# Altium PCB 2.PcbDoc (part 2 of 3)
Units mil, origin at the board's own origin, x right, y up, seen from the top; angles counter-clockwise.
Board outline 9055.12 x 5905.51 mil, 2 copper layers (Top Layer, Bottom Layer); 240 components, 221 nets, 945 pads, 441 vias.
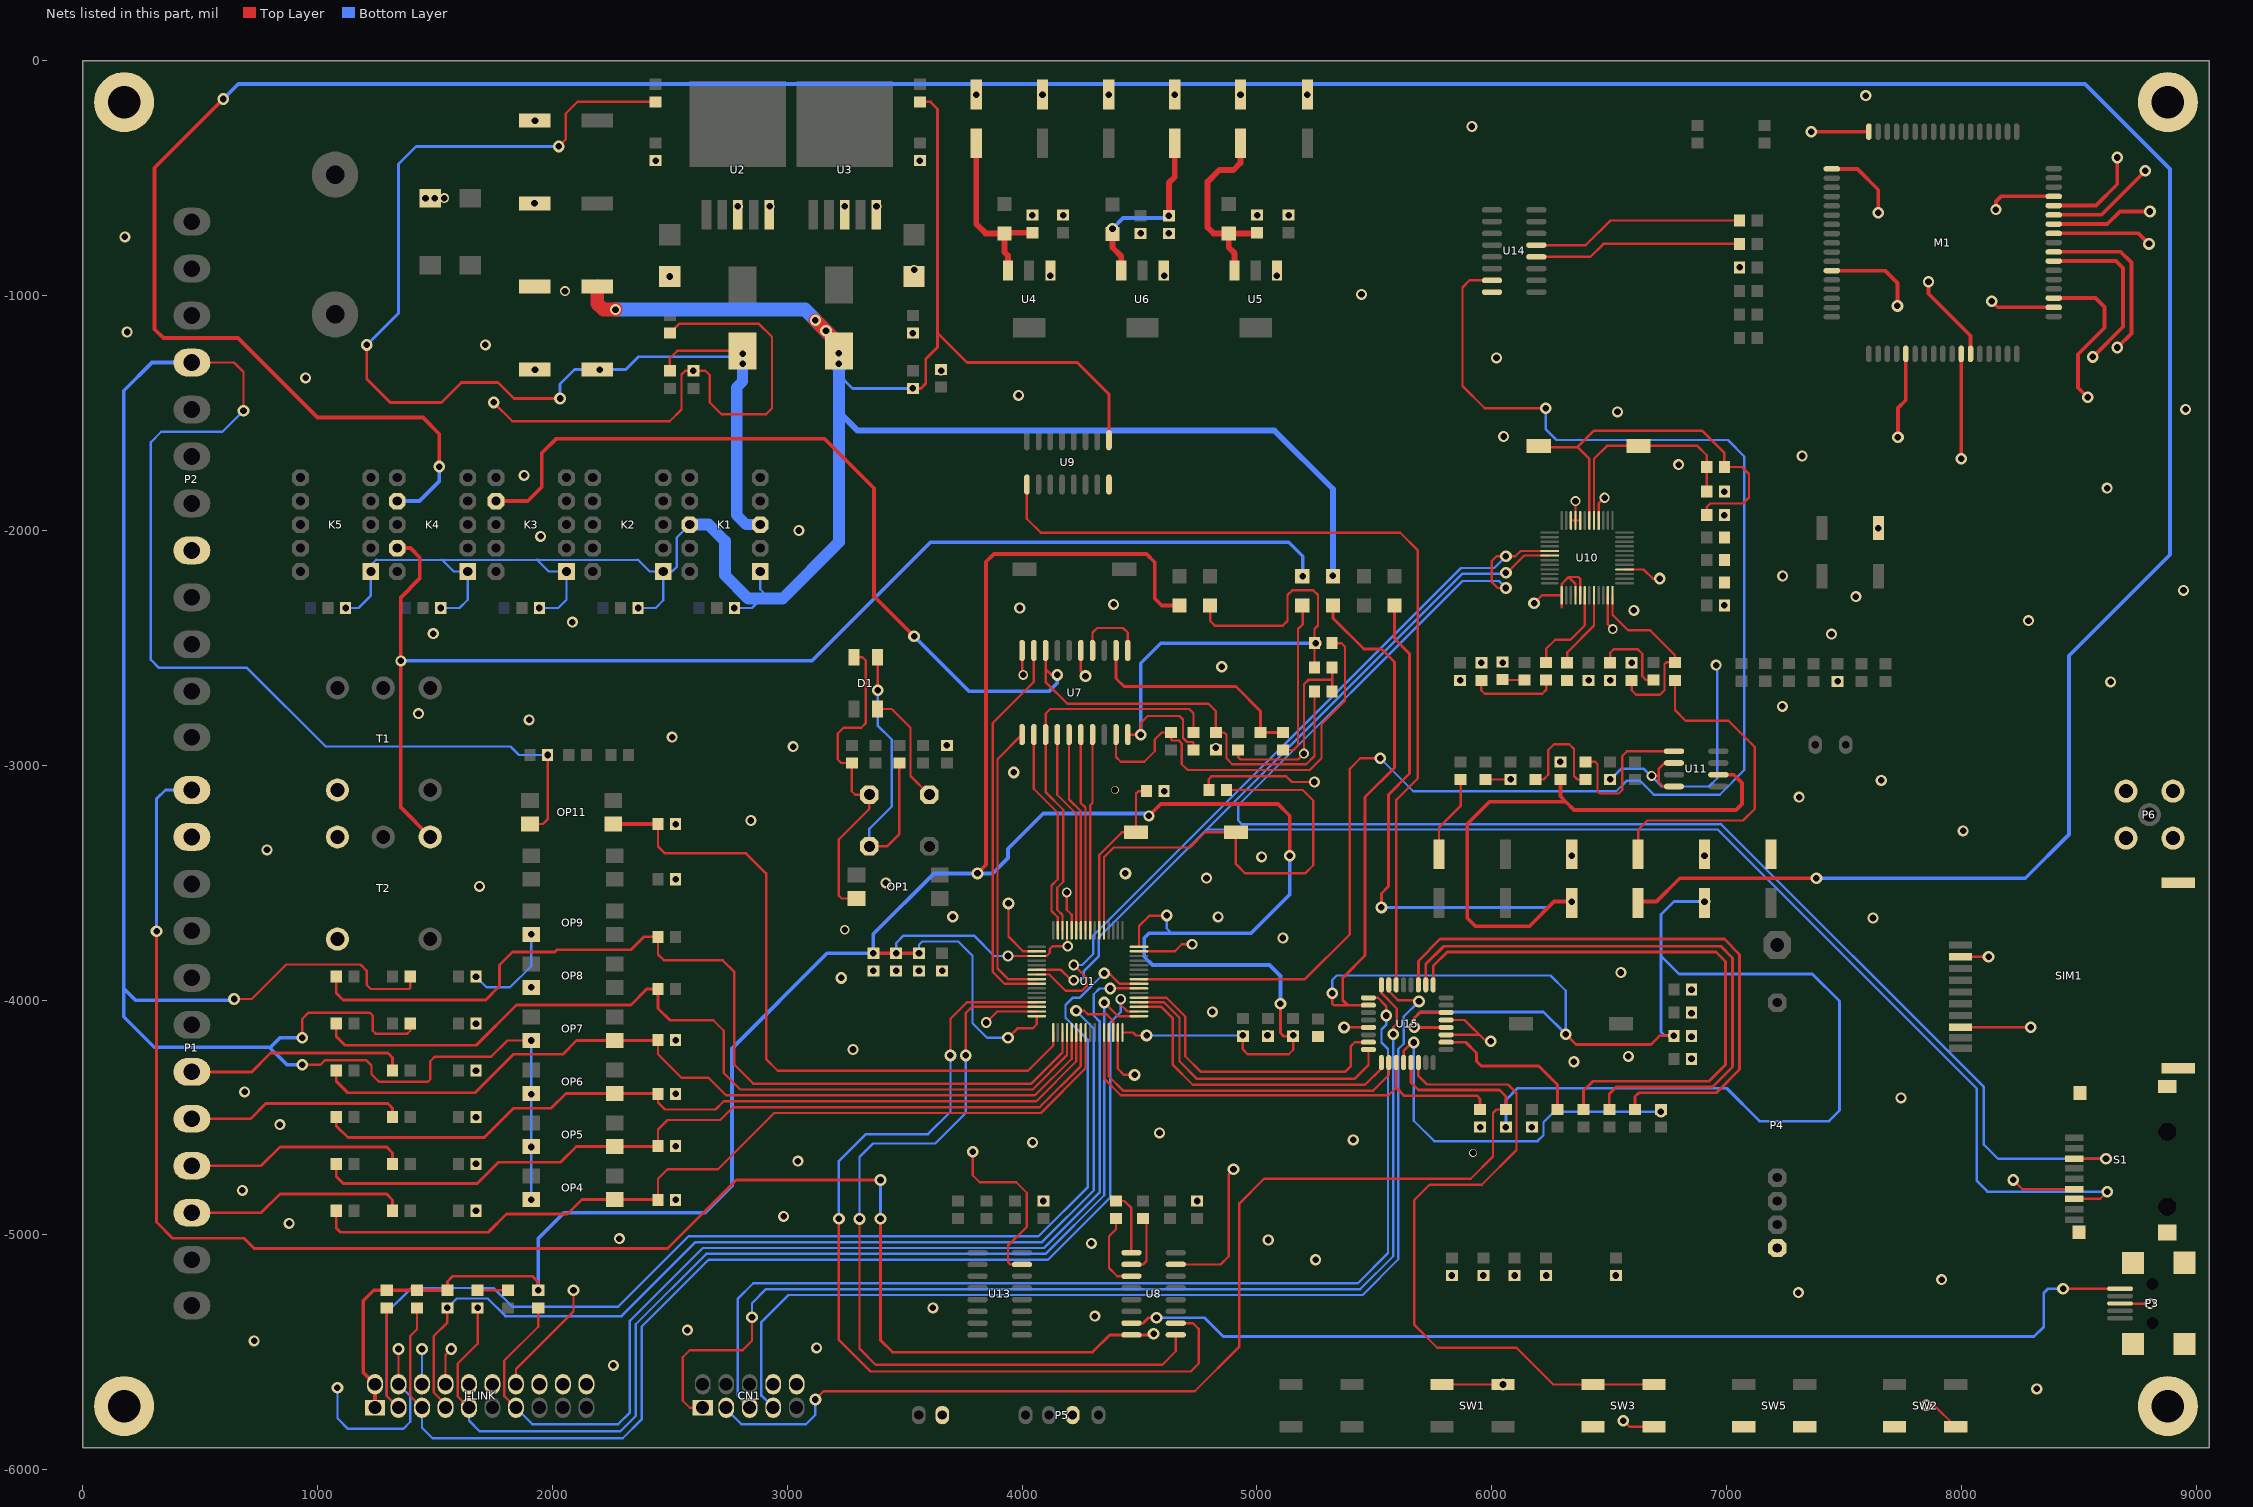
[diagram p2: the nets of this part, all layers, seen from the top]

## Via types
v1: diameter 50, hole 28, Top Layer to Bottom Layer, tented both sides, 188 vias
v2: diameter 47, hole 28, Top Layer to Bottom Layer, tented both sides, 131 vias
v3: diameter 42, hole 28, Top Layer to Bottom Layer, tented both sides, 79 vias
v4: diameter 45, hole 28, Top Layer to Bottom Layer, tented both sides, 27 vias
v5: diameter 46, hole 28, Top Layer to Bottom Layer, tented both sides, 11 vias
v6: diameter 35, hole 28, Top Layer to Bottom Layer, tented both sides, 3 vias
v7: diameter 44, hole 28, Top Layer to Bottom Layer, tented both sides, 1 vias
v8: diameter 48, hole 28, Top Layer to Bottom Layer, tented both sides, 1 vias

## Nets (pads, with @x,y where several pads share a name; then routed paths per layer and width w, separated by ;. In a path a pad name is that pad's centre, name@x,y a point inside that pad or via, vN(x,y) a via of type N, cw(c..) or ccw(c..) an arc to the next point about the centre after c; other vN are vias at no path point) (continued)
DEBUG_RX_RS232: P3.5 U8.7 | length 4428.7
  Top Layer w12: U8.7@4465.24,-5375.93 4514.58,-5375.93 4537.8,-5352.71 v1(4572.2,-5352.71) ; v1(8432.24,-5229.24) P3.5@8682.63,-5229.24
  Bottom Layer w12: v1(4572.2,-5352.71) 4776.6,-5352.71 4856.4,-5432.51 8308.6,-5432.51 8350,-5391.11 8350,-5247 8367.76,-5229.24 v1(8432.24,-5229.24)
DEBUG_TX_TTL: U1.29 U8.10 | length 3941.7
  Top Layer w10: v1(3220,-4930.51) 3220,-5447 3354,-5581 4718,-5581 4752,-5547 4752,-5400 4727.93,-5375.93 U8.10@4685.24,-5375.93 ; v1(3695,-4235.51) 3695,-4079.09 3765,-4009.09 U1.29@4062.48,-4009.09
  Bottom Layer w10: v1(3220,-4930.51) 3220,-4685.51 3335,-4570.51 3600,-4570.51 3695,-4475.51 v1(3695,-4235.51)
DTMF_INPUT: R16.2 R27.1 U7.2 | length 977.1
  Top Layer w12: U7.2@4400,-2511.38 4400,-2630.51 4435,-2665.51 4910,-2665.51 5015,-2770.51 R16.2@5015,-2860.51 R27.1@5110,-2860.51
DTMF_OUTPUT: C21.1 K3.9 R14.2 U7.8 | length 5234.2
  Top Layer w10: U7.8@4100,-2511.38 4100,-2590.51 ; v1(4150,-2615.51) 4125,-2615.51 4100,-2590.51 ; C21.1@5245,-2685.51 5245,-2960.51 5210,-2995.51 4895,-2995.51 4870,-2970.51 4870,-2870.51 4860,-2860.51 R14.2@4825,-2860.51 4825,-2770.51 4793.19,-2738.7 4193.19,-2738.7 4100,-2645.51 4100,-2590.51
  Top Layer w16: K3.9@1760,-1875.51 1895,-1875.51 1955,-1815.51 1955,-1670.51 2015,-1610.51 3160,-1610.51 3370,-1820.51 3370,-2280.51 v1(3540,-2450.51)
  Bottom Layer w16: v1(3540,-2450.51) 3775,-2685.51 4115,-2685.51 4150,-2650.51 v1(4150,-2615.51)
GBUF: R50.2 U10.42 | length 391.8
  Top Layer w10: R50.2@6231.14,-2562.28 6231.14,-2504.37 6270,-2465.51 6335,-2465.51 6395.71,-2404.8 U10.42@6395.71,-2276.69
GND: C3.2 C4.2 C5.2 C6.2 C7.2 C8.2 C9.2 C10.2 C11.2 C12.2 C13.2 C14.2 C15.2 C16.2 C17.2 C18.2 C19.2 C20.2 C21.2 C22.2 C23.2 C24.2 C25.1 C27.2 C29.2 C30.2 C31.2 C32.2 C35.1 C37.1 C38.1 C39.2 C40.1 C41.1 C42.1 C43.1 C44.2 C45.2 C46.2 C48.2 C50.2 C51.1 C54.2 C57.1 C59.2 C60.2 C61.2 C62.2 C63.2 C64.2 C65.1 C71.2 CN1.8 CN1.10 D3.1 D5.1 D6.1 D10.2 D11.2 D12.2 D13.2 D14.2 J-LINK.4 J-LINK.6 J-LINK.8 J-LINK.10 J-LINK.12 J-LINK.14 J-LINK.16 J-LINK.18 J-LINK.20 M1.17 M1.18 M1.29 M1.39 M1.45 M1.46 M1.53 M1.54 M1.58 M1.59 M1.61 M1.62 M1.63 M1.64 M1.65 OP8.2 OP9.2 P1.2 P2.8 P3.3 P3.6 P4.1 P5.3 P6.2 P7.2 pad. R5.1 R6.2 R7.2 R8.1 R10.1 R12.2 R13.2 R14.1 R15.1 R17.1 R29.2 R30.2 R34.2 R40.2 R41.2 R42.2 R43.2 R54.2 R63.2 R66.2 R67.2 R68.2 R69.2 R70.2 R71.2 R72.2 R77.2 R79.2 S1.6 SIM1.2 SIM1.8 SW1.2 SW2.2 SW3.2 SW5.2 T1.2 T2.2 T2.4 U1.12 U1.18 U1.31 U1.47 U1.63 U2.3 U2.5 U3.3 U3.5 U4.1 U5.1 U6.1 U7.5 U7.10 U8.15 U9.8 U10.4 U10.16 U10.20 U10.21 U10.22 U10.37 U10.40 U10.41 U10.47 U11.2 U11.4 U13.15 U14.8 U15.3 U15.5 U15.21 | length 19507.1
  Top Layer w10: J-LINK.4@1345,-5635.51 v1(1345,-5485.51) ; J-LINK.8@1545,-5635.51 1545,-5510.51 v1(1570,-5485.51) ; R30.2@1682,-5235.51 R29.2@1811,-5235.51 ; v1(1750,-1455.51) 1830,-1535.51 2500,-1535.51 2550,-1485.51 2550,-1337 2566.49,-1320.51 v3(2600,-1320.51) 2651.51,-1320.51 2670,-1339 2670,-1455.51 2720,-1505.51 2910,-1505.51 2935,-1480.51 2935,-1176 2880,-1121 2539.51,-1121 R8.1@2500,-1160.51 ; J-LINK.14@1845,-5635.51 1845,-5570.51 2090,-5325.51 v1(2090,-5235.51) ; v1(3790,-4645.51) 3790,-4745.51 3820,-4775.51 3975,-4775.51 4020,-4820.51 4020,-4965.51 3940,-5045.51 3940,-5115.51 3950,-5125.51 U13.15@3999.49,-5125.51 ; v5(3847,-4095.51) 3894.05,-4048.46 U1.31@4062.48,-4048.46 ; v1(3942,-3588.51) 3942,-3729.56 4005,-3792.56 U1.18@4062.48,-3792.56 ; U7.10@4000,-2511.38 4000,-2610.51 v3(4005,-2615.51) ; v2(4090,-4855.51) C57.1@4091.6,-4855.51 ; v3(4190,-3541.51) 4190,-3615.51 4211.1,-3636.61 U1.12@4211.1,-3702.99 ; U7.5@4250,-2511.38 4250,-2600.51 v1(4270,-2620.51) ; U1.47@4407.95,-4138.03 4407.95,-4292.46 4434,-4318.51 v1(4479,-4318.51) ; U1.63@4497.52,-3792.56 4649.95,-3792.56 4680,-3762.51 v5(4724,-3762.51) ; U8.15@4654.49,-5125.51 4845,-5125.51 4880,-5090.51 4880,-4740.51 v1(4900,-4720.51) ; C27.2@4795,-3105.51 4795,-3058.51 4806,-3047.51 5125,-3047.51 5149,-3071.51 v2(5244,-3071.51) ; R15.1@4920,-2935.51 4920,-2965.51 4930,-2975.51 5175,-2975.51 v3(5200,-2950.51) 5200,-2655.51 5218.84,-2636.67 5320,-2636.67 ; C21.2@5320,-2685.51 5320,-2636.67 ; C25.1@5320,-2583.21 5320,-2636.67 ; v1(5370.75,-4116.26) U15.21@5474.65,-4116.26 ; SW1.2@5787.5,-5636.61 v1(6047.5,-5636.61) ; U15.5@5805.35,-4084.76 5884.25,-4084.76 5975,-4175.51 v1(5995,-4175.51) ; U15.3@5810.35,-4147.76 5945,-4147.76 ; R54.2@5973.14,-3060.51 R63.2@6079.07,-3060.51 ; v1(6180,-2310.51) 6213.82,-2276.69 U10.37@6297.28,-2276.69 ; 6297.28,-2328.23 U10.37@6297.28,-2276.69 ; U10.22@6336.65,-1957.8 U10.21@6356.34,-1957.8 ; U10.40@6356.34,-2276.69 6356.34,-2228.54 6326.65,-2198.86 ; v3(6356.34,-1875.51) U10.21@6356.34,-1957.8 ; U10.20@6375.71,-1957.8 U10.21@6356.34,-1957.8 ; U10.41@6376.02,-2276.69 6376.02,-2206.54 6368.35,-2198.86 6326.65,-2198.86 ; U10.16@6454.76,-1957.8 6454.76,-1885.75 v7(6480,-1860.51) ; U10.47@6494.13,-2276.69 6494.13,-2399.65 v3(6515,-2420.51) ; v1(6560,-5790.51) 6586.1,-5816.61 SW3.2@6690,-5816.61 ; U10.4@6565,-2166.46 6645.94,-2166.46 6685,-2205.51 v1(6715,-2205.51) ; v3(6680,-3045.51) 6710,-3045.51 ; U11.4@6775.51,-3090.51 6730,-3090.51 6710,-3070.51 6710,-3045.51 ; U11.2@6775.51,-2990.51 6735,-2990.51 6710,-3015.51 6710,-3045.51 ; v1(7850,-5725.51) 7883.9,-5725.51 SW2.2@7975,-5816.61 ; SIM1.8@7995,-4115.51 v1(8295,-4115.51) ; SIM1.2@7995,-3815.51 v1(8115,-3815.51) ; v1(8220,-4765.51) 8260,-4805.51 S1.6@8480,-4805.51 ; P3.3@8682.63,-5292.23 v2(8802.23,-5292.23) ; U10.37@6297.28,-2276.69 6297.28,-2228.23 6326.65,-2198.86
  Top Layer w16: v1(7360.05,-302.46) M1.17@7605.04,-302.46 ; M1.29@7447.56,-894.23 7673.72,-894.23 7727,-947.51 v1(7727,-1044.51) ; M1.18@7447.56,-461.16 7556.65,-461.16 7645,-549.51 v1(7645,-647.51) ; v1(7729,-1603.51) 7729,-1479.51 7762.52,-1445.99 M1.39@7762.52,-1248.56 ; v2(7859,-941.51) 7859,-992.51 8038.11,-1171.62 M1.46@8038.11,-1248.56 ; v1(7998.5,-1695.02) M1.45@7998.5,-1248.56 ; v1(8128,-1024.51) 8153.98,-1050.49 8285.02,-1050.49 M1.53@8392.44,-1050.49 ; v2(8146,-634.51) 8146,-599.51 8167.46,-578.05 M1.65@8392.44,-578.05 ; M1.54@8392.44,-1011.12 8570.61,-1011.12 8609,-1049.51 8609,-1137.51 8496,-1250.51 8496,-1392.51 v1(8537,-1433.51) ; M1.58@8392.44,-853.64 8657.13,-853.64 8687,-883.51 8687,-1133.51 v1(8559,-1261.51) ; M1.59@8392.44,-814.27 8677.76,-814.27 8723,-859.51 8723,-1161.51 v1(8663,-1221.51) ; M1.61@8392.44,-735.53 8753.02,-735.53 v1(8798,-780.51) ; M1.62@8392.44,-696.16 8620.35,-696.16 8674,-642.51 v1(8802,-642.51) ; M1.63@8392.44,-656.79 8594.72,-656.79 v1(8782,-469.51) ; M1.64@8392.44,-617.42 8572.09,-617.42 8663,-526.51 v1(8663,-412.51)
  Bottom Layer w10: v1(1085,-5650.51) 1085,-5780.51 1130,-5825.51 1365,-5825.51 1395,-5795.51 1395,-5685.51 J-LINK.4@1345,-5635.51 J-LINK.4@1370,-5635.51 ; J-LINK.6@1445,-5635.51 v1(1445,-5485.51) ; v3(1675,-3900.51) 1720,-3945.51 1820,-3945.51 1910,-3855.51 v3(1910,-3720.51) ; v3(6505,-3060.51) 6550,-3015.51 6647.47,-3015.51 6677.47,-3045.51 v3(6680,-3045.51) 6725,-3090.51 6925,-3090.51 6960,-3055.51 v2@6960,-2570.51
  other v1: 3230,-3905.51 3705,-3645.51 4440,-3460.51 3965,-3030.51 4850,-2580.51
  other v2: 8320,-5655.51 2260,-5555.51 3125,-5480.51 730,-5450.51 2575,-5405.51 4310,-5345.51 3620,-5310.51 7305,-5245.51 7915,-5190.51 5830,-5172.51 5963.67,-5172.51 6097.33,-5172.51 6231,-5172.51 6528,-5172.51 5250,-5105.51 4295,-5035.51 5048,-5021.51 2285,-5015.51 879,-4951 2985,-4920.51 4745,-4855.51 680,-4810.51 3045,-4685.51 4045,-4605.51 5410,-4595.51 4585,-4565.51 840,-4530.51 7742,-4416.51 690,-4390.51 6349,-4262.51 6581,-4239.51 3280,-4210.51 4810,-4050.51 1910,-3946.23 6549,-3882.51 3366.49,-3875.51 3463.82,-3875.51 3561.16,-3875.51 3660,-3875.51 5110,-3735.51 7623,-3650.51 4835,-3645.51 1690,-3515.51 3420,-3500.51 2525,-3485.51 4785,-3480.51 5020,-3390.51 6905.4,-3385.51 785,-3360.51 8007,-3279.51 2525,-3250.51 2845,-3235.51 7308,-3135.51 4605,-3110.51 7658,-3064.51 3025,-2920.51 2510,-2880.51 1901,-2806.51 1430,-2780.51 7237,-2749.51 8635,-2645.51 7472.24,-2642.9 6955,-2573.51 7446,-2441.51 1493,-2439.51 2085,-2390.51 8285,-2384.51 6605,-2340.51 3990,-2330.51 6990,-2319.26 4390,-2315.51 7550,-2282.51 8945,-2255.51 7238,-2194.51 1950,-2025.51 3050,-2000.51 7646,-1990.51 8620,-1820.51 1880,-1765.51 6795,-1720.51 7321,-1683.51 6050,-1600.51 6535,-1495.51 8954,-1484.51 3985,-1425.51 950,-1350.51 6020,-1265.51 1715,-1210.51 190,-1155.51 5445,-995.51 180,-750.51 5915,-280.51 7592,-149.51
  other v3: 1675,-4896.94 2525,-4850.51 1675,-4697.65 2525,-4621.94 5950,-4540.51 6170,-4540.51 1675,-4498.37 2525,-4399.08 1675,-4300.51 6850,-4250.51 2525,-4170.51 6850,-4155.51 1675,-4100.51 6850,-4055.51 6850,-3955.51 3245,-3700.51 6340.2,-3385.51 6080,-3060.51 6292.01,-2985.51 4825,-2925.51 3680,-2915.51 5865,-2638.9 6412.38,-2638.9 6504.06,-2638.9 5955,-2563.9 6046.48,-2563.9 6595.33,-2563.9 6990,-1935.51 6990,-1835.51 3655,-1320.51 1926,-1315.51 3535,-1160.51 2054,-981.51 2500,-919.09 4120,-915.51 4605,-915.51 5085,-915.51 3540,-890.51 7055,-880.51 4505,-735.51 4625,-735.51 4043.65,-658.11 4175,-658.11 5001.15,-658.11 5135,-658.11 2790,-620.51 2925,-620.51 3245,-620.51 3380,-620.51 1924,-606.51 1460,-585.51 1500,-585.51 1540,-585.51 2440,-425.51 3565,-425.51 1926,-255.51 3805,-144.51 4087,-144.51 4369,-144.51 4650,-144.51 4930,-144.51 5215,-144.51
  other v5: 5045,-4150.51
  other v6: 5920,-4650.51 4395,-3105.51
GND2: OP4.2 OP5.2 OP6.2 OP7.2 OP11.2 P2.4 R61.1 R62.1 R78.2 | length 11932.4
  Top Layer w10: P2.4@465,-1285.51 645,-1285.51 685,-1325.51 v1(685,-1490.51) ; v1(645,-3995.51) 720,-3995.51 867,-3848.51 1183,-3848.51 1210,-3875.51 1210,-3935.51 1227.19,-3952.7 1390,-3952.7 1395,-3947.7 R62.1@1395,-3900.51 ; v1(935,-4275.51) 1012.34,-4275.51 1031.17,-4256.68 1208.36,-4256.68 1230,-4278.32 1230,-4315.51 1262.19,-4347.7 1470,-4347.7 1480,-4337.7 1480,-4260.51 1500,-4240.51 1740,-4240.51 1808.57,-4171.94 v1(1910,-4171.94) ; v1(935,-4160.51) 935,-4080.51 962.19,-4053.32 1222.81,-4053.32 1235,-4065.51 1235,-4130.51 1247.19,-4142.7 1382.81,-4142.7 1395,-4130.51 R61.1@1395,-4099.8 ; OP11.2@1905,-3250.51 1960,-3250.51 1980,-3230.51 v2(1980,-2956.51) R78.2@1980,-2955.51
  Bottom Layer w10: v1(685,-1490.51) 595,-1580.51 335,-1580.51 290,-1625.51 290,-2550.51 325,-2585.51 700,-2585.51 1035,-2920.51 1822,-2920.51 1858,-2956.51 v2(1980,-2956.51) ; v1(1910,-4850.51) v1(1910,-4625.51) v1(1910,-4400.51) v1(1910,-4171.94)
  Bottom Layer w16: P2.4@465,-1285.51 295,-1285.51 175,-1405.51 175,-3950.51 ; v1(645,-3995.51) 640,-4000.51 225,-4000.51 175,-3950.51 ; v1(935,-4275.51) 870,-4275.51 795,-4200.51 ; v1(935,-4160.51) 840,-4160.51 800,-4200.51 795,-4200.51 ; 175,-3950.51 175,-4070.51 305,-4200.51 795,-4200.51
IN_Q1: P1.7 R49.1 | length 950
  Top Layer w12: P1.7@465,-4305.51 720,-4305.51 800,-4225.51 1300,-4225.51 1320,-4245.51 R49.1@1320,-4299.08
IN_Q2: P1.8 R48.1 | length 928.1
  Top Layer w12: P1.8@465,-4505.51 715,-4505.51 780,-4440.51 1300,-4440.51 1320,-4460.51 R48.1@1320,-4498.37
IN_Q3: P1.9 R47.1 | length 945.6
  Top Layer w12: P1.9@465,-4705.51 760,-4705.51 840,-4625.51 1295,-4625.51 1320,-4650.51 R47.1@1320,-4697.65
IN_Q4: P1.10 R46.1 | length 944.9
  Top Layer w12: P1.10@465,-4905.51 760,-4905.51 840,-4825.51 1295,-4825.51 1320,-4850.51 R46.1@1320,-4896.94
INPUT-4V: C19.1 D8.1 K1.3 L4.2 R9.2 | length 5206.6
  Top Layer w10: v1(2027,-365.51) 2057,-335.51 2057,-225.51 2107,-175.51 D8.1@2440,-175.51 ; R9.2@2500,-1320.51 2500,-1268 2532.49,-1235.51 L4.2@2785,-1235.51
  Top Layer w12: v1(1210,-1210.51) 1210,-1355.51 1310,-1455.51 1527.5,-1455.51 1612.5,-1370.51 1769,-1370.51 1837,-1438.51 v1(2033,-1438.51)
  Bottom Layer w12: v1(1210,-1210.51) 1345,-1075.51 1345,-440.51 1420,-365.51 v1(2027,-365.51) ; v1(2033,-1438.51) 2033,-1377.51 2095,-1315.51 v1(2202,-1315.51) 2312.49,-1315.51 2367,-1261 v2@2810,-1261
  Bottom Layer w47.24: v2@2810,-1261 2810,-1367 2785,-1392 2785,-1935.51 2825,-1975.51 K1.3@2885,-1975.51
  other v2: 2810,-1291 2810,-1249
INPUT-5V: C20.1 D4.1 D7.1 D9.1 D15.1 D16.1 D23.1 K1.8 K1.10 K2.10 K3.10 K4.10 K5.10 L5.2 L8.2 R11.2 U9.9 | length 11570.3
  Top Layer w10: D15.1@1935,-2330.51 D15.1@1945,-2320.51
  Top Layer w12: v2(3535,-1395.51) 3570,-1395.51 3590,-1375.51 3590,-1270.51 3640,-1220.51 3640,-1160.51 ; D9.1@3565,-175.51 3610,-175.51 3640,-205.51 3640,-1160.51 ; U9.9@4370,-1616.02 4370,-1420.51 4235,-1285.51 3765,-1285.51 3640,-1160.51
  Top Layer w25: L8.2@5323.57,-2195.51 v1(5323.57,-2194.08)
  Top Layer w59.06: C20.1@2191,-962.18 2191,-1034.51 2217,-1060.51 v2(2269,-1060.51) ; v2(3120,-1105.51) v1(3165,-1150.51) 3220,-1205.51 v1(3220,-1245.51)
  Bottom Layer w9: 1250,-2125.51 1530,-2125.51 1935,-2125.51 2365,-2125.51
  Bottom Layer w10: v4(1120,-2330.51) 1175,-2330.51 1227.5,-2278.01 K5.10@1227.5,-2175.51 1227.5,-2148.01 1250,-2125.51 ; v4(1525,-2330.51) 1605,-2330.51 1640,-2295.51 K4.10@1640,-2175.51 1580,-2175.51 1530,-2125.51 ; 1935,-2125.51 1985,-2175.51 K3.10@2060,-2175.51 2060,-2295.51 2025,-2330.51 v4(1945,-2330.51) ; v4(2365,-2330.51) 2440,-2330.51 2472.5,-2298.01 K2.10@2472.5,-2175.51 ; 2365,-2125.51 2415,-2175.51 K2.10@2472.5,-2175.51 ; K1.8@2585,-1975.51 2530,-2030.51 2530,-2155.51 2510,-2175.51 K2.10@2472.5,-2175.51 ; v4(2775,-2330.51) 2850,-2330.51 2885,-2295.51 2885,-2290.51 ; K1.10@2885,-2175.51 2885,-2250.51 2925,-2290.51
  Bottom Layer w12: 3220,-1337 3278.51,-1395.51 v2(3535,-1395.51)
  Bottom Layer w25: 3220,-1495.51 3300,-1575.51 5075,-1575.51 5323.57,-1824.08 v1(5323.57,-2194.08)
  Bottom Layer w50: K1.8@2585,-1975.51 2665,-1975.51 2735,-2045.51 2735,-2190.51 2835,-2290.51 2885,-2290.51 2925,-2290.51 2980,-2290.51 3220,-2050.51 3220,-1495.51 3220,-1337 v8@3220,-1305.51
  Bottom Layer w59.06: v2(2269,-1060.51) 3075,-1060.51 v1(3165,-1150.51) 3220,-1205.51
  Bottom Layer w60: v8@3220,-1305.51 v1(3220,-1245.51) 3220,-1205.51
  other v8: 3220,-1291
INTERCOM_IRQ: OP11.3 R79.1 U1.33 | length 2925.3
  Top Layer w10: R79.1@2450,-3250.51 2450,-3345.51 2480,-3375.51 2825,-3375.51 2910,-3460.51 2910,-4250.51 2960,-4300.51 4025,-4300.51 4132.36,-4193.15 U1.33@4132.36,-4138.03
  Top Layer w16: OP11.3@2260,-3250.51 R79.1@2450,-3250.51
IR_RX_TTL: U1.30 U8.9 | length 3564.2
  Top Layer w10: v1(3307.76,-4931.76) 3307.76,-5483.76 3377,-5553 4597,-5553 4654.49,-5495.51 U8.9@4654.49,-5425.51 ; v1(3760,-4235.51) 3760,-4055.51 3786.73,-4028.78 U1.30@4062.48,-4028.78 ; U8.9@4674.58,-5425.93 U8.9@4685.24,-5425.93
  Bottom Layer w10: v1(3307.76,-4931.76) 3307.76,-4667.76 3365,-4610.51 3630,-4610.51 3760,-4480.51 v1(3760,-4235.51)
IR_TX_RS232: P1.1 U8.8 | length 7116.7
  Top Layer w12: v1(315,-3706.51) 315,-4945.51 383.49,-5014 687,-5014 731,-5058 2491,-5058 2783,-4766 v1(3397,-4766) ; v1(3397,-4931) 3397,-5448 3448,-5499 4300,-5499 4373.49,-5425.51 U8.8@4465.51,-5425.51 ; U8.8@4465.24,-5425.93 4554.58,-5425.93 v1(4560,-5420.51)
  Bottom Layer w12: v1(315,-3706.51) 315,-3143 352.49,-3105.51 P1.1@465,-3105.51 ; v1(3397,-4931) v1(3397,-4766)
JNTRST: J-LINK.3 R33.1 U1.56 | length 5345.7
  Top Layer w10: R33.1@1295,-5310.51 1295,-5685.51 J-LINK.3@1345,-5735.51 ; v1(4350,-3885.51) 4355,-3890.51 4375,-3890.51 4414.84,-3930.35 U1.56@4497.52,-3930.35
  Bottom Layer w10: J-LINK.3@1345,-5735.51 1295,-5685.51 1295,-5330.51 1400,-5225.51 1750,-5225.51 1830,-5305.51 2280,-5305.51 2580,-5005.51 4070,-5005.51 4280,-4795.51 4280,-4170.06 4185,-4075.06 4185,-4020.51 4215,-3990.51 4245,-3990.51 v1(4350,-3885.51)
JTCK: J-LINK.9 R30.1 U1.49 | length 4894.9
  Top Layer w10: J-LINK.9@1645,-5735.51 1597,-5687.51 1597,-5547.51 1682,-5462.51 v4(1682,-5310.51) ; v1(4350,-4010.51) 4407.64,-4068.15 U1.49@4497.52,-4068.15
  Bottom Layer w10: J-LINK.9@1645,-5735.51 1645,-5790.51 1690,-5835.51 2290,-5835.51 2355,-5770.51 2355,-5380.51 2655,-5080.51 4100,-5080.51 4350,-4830.51 v1(4350,-4010.51)
JTDI: J-LINK.5 R32.1 U1.50 | length 5124.8
  Top Layer w10: R32.1@1424,-5310.51 1424,-5401.51 1395,-5430.51 1395,-5685.51 J-LINK.5@1445,-5735.51 ; v4(4420,-3995.51) 4420,-4020.15 4448.31,-4048.46 U1.50@4497.52,-4048.46
  Bottom Layer w10: J-LINK.5@1445,-5735.51 1445,-5820.51 1490,-5865.51 2300,-5865.51 2380,-5785.51 2380,-5390.51 2665,-5105.51 4110,-5105.51 4375,-4840.51 4375,-4095.51 4420,-4050.51 v4(4420,-3995.51)
JTDO: J-LINK.13 R28.1 U1.55 | length 4713.6
  Top Layer w10: J-LINK.13@1845,-5735.51 1795.52,-5686.03 1795.52,-5534.99 1940,-5390.51 R28.1@1940,-5310.51 ; v1(4375,-3950.51) 4375.47,-3950.04 U1.55@4497.52,-3950.04
  Bottom Layer w10: J-LINK.13@1845,-5735.51 1915,-5805.51 2280,-5805.51 2330,-5755.51 2330,-5365.51 2640,-5055.51 4093.89,-5055.51 4330,-4819.4 4330,-4090.51 4305,-4065.51 4305,-3975.51 4330,-3950.51 v1(4375,-3950.51)
JTMS: J-LINK.7 R31.1 U1.46 | length 4526.6
  Top Layer w10: J-LINK.7@1545,-5735.51 1545,-5720.51 1495,-5670.51 1495,-5430.51 1553,-5372.51 v4(1553,-5310.51) ; v1@4240,-4055.51 v1(4230,-4045.51) 4265,-4045.51 4280,-4060.51 4360,-4060.51 4388.27,-4088.78 U1.46@4388.27,-4138.03
  Bottom Layer w10: v4(1553,-5310.51) 1593,-5270.51 1725,-5270.51 1800,-5345.51 2295,-5345.51 2610,-5030.51 4085,-5030.51 4305,-4810.51 4305,-4120.51 v1(4230,-4045.51)
LEARN: SW3.1 U15.30 | length 2928.1
  Top Layer w10: U15.30@5687.24,-4265.87 5687.24,-4322.76 5723.81,-4359.32 6068.81,-4359.32 6105,-4395.51 6105,-4638.51 5957,-4786.51 5735,-4786.51 5669,-4852.51 5669,-5381.51 5768,-5480.51 6105,-5480.51 6261.1,-5636.61 SW3.1@6430,-5636.61 SW3.1@6690,-5636.61
LED0: R22.1 U15.2 | length 675.3
  Top Layer w12: U15.2@5805.35,-4179.25 5888.74,-4179.25 5935,-4225.51 5935,-4260.51 5955,-4280.51 6200,-4280.51 6280.21,-4360.72 R22.1@6280.21,-4465.51
LED1: R21.1 U15.9 | length 2536.5
  Top Layer w12: U15.9@5750.24,-3935.16 5750.24,-3855.28 5810,-3795.51 6955,-3795.51 6995,-3835.51 6995,-4275.51 6925,-4345.51 6430,-4345.51 6390,-4385.51 R21.1@6390,-4465.51
LED2: R18.1 U15.10 | length 2549.6
  Top Layer w12: U15.10@5718.74,-3935.16 5718.74,-3846.77 5795,-3770.51 6975,-3770.51 7025,-3820.51 7025,-4285.51 6940,-4370.51 6530,-4370.51 6500,-4400.51 R18.1@6500,-4465.51
LED3: R20.1 U15.11 | length 2572.6
  Top Layer w12: U15.11@5687.24,-3935.16 5687.24,-3833.27 5780,-3740.51 6990,-3740.51 7055,-3805.51 7055,-4295.51 6956.19,-4394.32 6626.19,-4394.32 6610,-4410.51 R20.1@6610,-4465.51
LED-NETLIGHT: R65.2 U14.12 | length 888.3
  Top Layer w10: U14.12@6189.49,-835.51 6420,-835.51 6475,-780.51 R65.2@7055,-780.51
LED-STATUS: R64.2 U14.13 | length 909
  Top Layer w10: U14.13@6189.49,-785.51 6400,-785.51 6505,-680.51 R64.2@7055,-680.51
LED_STATUS: R74.1 U15.28 | length 1613.1
  Top Layer w10: U15.28@5624.25,-4265.87 5624.25,-4216.26 v1@5660,-4180.51
  Top Layer w12: v1@5660,-4180.51 v1(5667.81,-4180.51)
  Bottom Layer w10: v1(5667.81,-4180.51) 5667.81,-4513.32 5755,-4600.51 6195,-4600.51 6220,-4575.51 6220,-4520.51 6265,-4475.51 v1(6720,-4475.51)
LINE_RECORD: C36.1 K4.9 | length 16342.3
  Top Layer w16: v1(599,-163.51) 306,-456.51 306,-1143.51 344,-1181.51 662,-1181.51 1000,-1519.51 1449,-1519.51 1518,-1588.51 v1(1518,-1728.51) ; C36.1@6622.8,-3580.51 6701,-3580.51 6800,-3481.51 v1(7382,-3481.51)
  Bottom Layer w16: v1(599,-163.51) 663,-99.51 8525,-99.51 8887,-461.51 8887,-2103.51 8457,-2533.51 8457,-3295.51 8271,-3481.51 v1(7382,-3481.51) ; K4.9@1340,-1875.51 1434,-1875.51 1518,-1791.51 v1(1518,-1728.51)
LM-5V: C48.1 C50.1 L7.1 U11.6 | length 4606.7
  Top Layer w12: v1@5530,-3583.13 5530,-3545.51 5560,-3515.51 5560,-3125.51 5650,-3035.51 5650,-2525.51 5585,-2460.51 L7.1@5585,-2320.51
  Top Layer w16: C50.1@6292.01,-3060.51 6292.01,-3132.52 6315,-3155.51 ; v1(6340.2,-3580.51) 6265,-3580.51 6160,-3685.51 5930,-3685.51 5895,-3650.51 5895,-3250.51 5990,-3155.51 6315,-3155.51 ; U11.6@6964.49,-3040.51 7030,-3040.51 7065,-3075.51 7065,-3165.51 7040,-3190.51 6350,-3190.51 6315,-3155.51
  Bottom Layer w12: v1(5530,-3605.51) 6240,-3605.51 6265,-3580.51 v1(6340.2,-3580.51)
M8-5V: C59.1 C60.1 L8.1 R35.2 U15.4 U15.6 U15.18 | length 8684.9
  Top Layer w10: v1(5320,-3970.51) 5320,-4015.51 5326.26,-4021.77 5386.26,-4021.77
  Top Layer w12: L8.1@5323.57,-2320.51 5323.57,-2374.08 5455,-2505.51 5530,-2505.51 5585,-2560.51 5585,-3010.51 5460,-3135.51 5460,-3810.51 5365,-3905.51 5365,-4000.51 5386.26,-4021.77 U15.18@5474.65,-4021.77 ; U15.4@5805.35,-4116.26 5670.75,-4116.26 v1(5670,-4115.51) 5670,-4075.51 5692.24,-4053.27 U15.6@5805.35,-4053.27 ; v1(6315,-4145.51) 6358,-4188.51 6677,-4188.51 6713.33,-4152.18 v1(6775,-4152.18)
  Bottom Layer w10: v1(5320,-3970.51) 5320,-3915.51 5340,-3895.51 6250,-3895.51 6315,-3960.51 v1(6315,-4145.51)
  Bottom Layer w12: v1(5670,-4115.51) 5670,-4075.51 5695,-4050.51 6220,-4050.51 v1(6315,-4145.51) ; v2(6060,-4540.51) 6060,-4425.51 6110,-4375.51 7000,-4375.51 7140,-4515.51 7435,-4515.51 7480,-4470.51 7480,-4004.51 7364,-3888.51 6797,-3888.51 6720,-3811.51 ; v1@6780,-4150.51 6735,-4150.51 6720,-4135.51 6720,-3811.51 ; v1@6904,-3580.51 6775,-3580.51 6720,-3635.51 6720,-3755.51 6720,-3811.51
  other v1: 6905.4,-3580.51
M8_MISO: CN1.1 U15.16 | length 4772.9
  Top Layer w10: CN1.1@2640,-5735.51 2585,-5735.51 2555,-5705.51 2555,-5520.51 2585,-5490.51 2810,-5490.51 2850,-5450.51 v1(2850,-5350.51) ; U15.16@5529.76,-3935.16 5529.76,-3970.28 5595,-4035.51 5595,-4100.51 5580,-4115.51 v1(5580,-4145.51)
  Bottom Layer w10: v1(2850,-5350.51) 2850,-5290.51 2910,-5230.51 5440,-5230.51 5580,-5090.51 v1(5580,-4145.51) v1@5580,-4140.51
M8_MOSI: CN1.7 U15.15 | length 4516.3
  Top Layer w10: U15.15@5561.26,-3935.16 5561.26,-3961.84 5599.93,-4000.51 5685,-4000.51 v1(5690,-4005.51)
  Bottom Layer w10: CN1.7@2940,-5735.51 2940,-5734.09 2890,-5684.09 2890,-5370.51 3005,-5255.51 5450,-5255.51 5601.81,-5103.7 5601.81,-4208.7 5625,-4185.51 5625,-4070.51 v1(5690,-4005.51)
M8_Q0: U1.53 U15.23 | length 1308.7
  Top Layer w10: U1.53@4497.52,-3989.41 4613.9,-3989.41 4695,-4070.51 4695,-4238.7 4761.81,-4305.51 5375,-4305.51 5400,-4280.51 5400,-4195.51 5416.26,-4179.25 U15.23@5474.65,-4179.25
M8_Q1: U1.52 U15.24 | length 1310.5
  Top Layer w10: U1.52@4497.52,-4009.09 4603.58,-4009.09 4670,-4075.51 4670,-4260.51 4745,-4335.51 5415,-4335.51 5474.65,-4275.87 U15.24@5474.65,-4210.75
M8_Q2: U1.51 U15.25 | length 1339.5
  Top Layer w10: U1.51@4497.52,-4028.78 4593.27,-4028.78 4640.91,-4076.42 4640.91,-4274.61 4726.81,-4360.51 5460,-4360.51 5529.76,-4290.75 U15.25@5529.76,-4265.87
M8_Q3: U1.45 U15.26 | length 1485
  Top Layer w10: U1.45@4368.58,-4138.03 4368.58,-4324.09 4430,-4385.51 5495,-4385.51 5561.26,-4319.25 U15.26@5561.26,-4265.87
M8_RELAY_POWER: U9.1 U15.14 | length 3754.3
  Top Layer w10: U9.1@4020,-1805 4020,-1950.51 4080,-2010.51 5610,-2010.51 5685,-2085.51 5685,-3055.51 5592.76,-3147.76 U15.14@5592.76,-3935.16
M8_RESET: CN1.3 R35.1 U15.29 | length 4979.9
  Top Layer w10: v1(3120,-5700.51) 3155,-5665.51 4735,-5665.51 4925,-5475.51 4925,-4865.51 5030,-4760.51 5910,-4760.51 6005,-4665.51 6005,-4480.51 6020,-4465.51 R35.1@6060,-4465.51
  Top Layer w12: U15.29@5655.75,-4265.87 5655.75,-4351.26 5687.62,-4383.13 6032.62,-4383.13 6060,-4410.51 R35.1@6060,-4465.51
  Bottom Layer w10: CN1.3@2740,-5735.51 2740,-5740.51 2805,-5805.51 3080,-5805.51 3120,-5765.51 v1(3120,-5700.51)
M8_SCK: CN1.5 U15.17 | length 4495.6
  Top Layer w10: U15.17@5474.65,-3990.28 5514.76,-3990.28 5550,-4025.51 v1(5550,-4065.51)
  Bottom Layer w10: CN1.5@2840,-5735.51 2790,-5685.51 2790,-5270.51 2855,-5205.51 5430,-5205.51 5558.19,-5077.32 5558.19,-4208.7 5530,-4180.51 5530,-4125.51 5550,-4105.51 v1(5550,-4065.51)
M8_TO_STM32: R6.1 U1.44 U15.27 | length 2012.3
  Top Layer w10: U1.44@4348.9,-4138.03 4348.9,-4334.41 4420,-4405.51 5560.51,-4405.51 5592.76,-4373.27
  Top Layer w12: U15.27@5592.76,-4265.87 5592.76,-4373.27 5626.43,-4406.94 5936.43,-4406.94 5950,-4420.51 R6.1@5950,-4465.51
MCU-3.3V: C22.1 C23.1 C24.1 J-LINK.1 J-LINK.2 L6.1 R19.2 R28.2 R31.2 R32.2 R33.2 R75.2 U1.13 U1.19 U1.32 U1.48 U1.64 | length 13603.4
  Top Layer w10: v1@3940,-4150.51 v1(3940,-4160.51) 3980,-4120.51 4045,-4120.51 4062.48,-4103.03 U1.32@4062.48,-4068.15 ; v5(3940,-3812.24) U1.19@4062.48,-3812.24 4104.27,-3812.24 4118,-3798.51 4118,-3782.51 4130,-3770.51 v4(4195,-3770.51) 4191.42,-3766.93 U1.13@4191.42,-3702.99 ; U1.48@4427.95,-4138.03 4472.52,-4138.03 4485,-4150.51 v1(4530,-4150.51) v1@4517.52,-4138.03 ; U1.64@4497.52,-3772.87 4497.52,-3684.99 4542,-3640.51 4615,-3640.51 v1(4616,-3639.51) ; R19.2@4940,-4153.9 4940,-4210.51 4960,-4230.51 5135,-4230.51 5154.34,-4211.17 R75.2@5154.34,-4153.9
  Top Layer w12: R31.2@1553,-5235.51 1553,-5197.51 1575,-5175.51 1915,-5175.51 1940,-5200.51 v2(1940,-5235.51) ; v1(5100,-4015.51) 5100,-4140.51 5113.39,-4153.9 R75.2@5154.34,-4153.9
  Top Layer w16: J-LINK.1@1245,-5735.51 J-LINK.2@1245,-5635.51 1195,-5585.51 1195,-5280.51 1240,-5235.51 R33.2@1295,-5235.51 R32.2@1424,-5235.51 R31.2@1553,-5235.51 ; v2(3366.49,-3800.51) v2(3463.82,-3800.51) v2(3561.16,-3800.51) ; v1(3810,-3460.51) 3846.71,-3423.8 3846.71,-2133.8 3880,-2100.51 4530,-2100.51 4565,-2135.51 4565,-2290.51 4595,-2320.51 L6.1@4670,-2320.51 ; v2(4540,-3215.51) 4590,-3165.51 5090,-3165.51 5140,-3215.51 v1(5140,-3385.51)
  Bottom Layer w10: v2(3463.82,-3800.51) 3463.82,-3756.69 3495,-3725.51 3795,-3725.51 3881.73,-3812.24 v5(3940,-3812.24) ; v2(3561.16,-3800.51) 3561.16,-3764.36 3575,-3750.51 3728,-3750.51 3789,-3811.51 3789,-4098.51 3851,-4160.51 v1(3940,-4160.51) ; v1(4530,-4150.51) v2(4940,-4150.51) ; v1(4616,-3639.51) 4616,-3695.51 4636,-3715.51
  Bottom Layer w16: v2(1940,-5235.51) 1940,-5015.51 2050,-4905.51 2650,-4905.51 2765,-4790.51 2765,-4205.51 3170,-3800.51 v2(3366.49,-3800.51) 3366.49,-3719.02 3625,-3460.51 v1(3810,-3460.51) 3875,-3460.51 3940,-3395.51 3940,-3355.51 4090,-3205.51 4530,-3205.51 v2(4540,-3215.51) ; v1(5100,-4015.51) 5100,-3897.27 5053.24,-3850.51 4555,-3850.51 4520,-3815.51 4520,-3735.51 4540,-3715.51 4636,-3715.51 4975,-3715.51 5140,-3550.51 v1(5140,-3385.51)
  other v2: 5155,-4150.51
MCU-SIM-RESET: U1.57 U14.7 | length 6805.7
  Top Layer w10: U1.57@4497.52,-3910.67 5204.84,-3910.67 5395,-3720.51 5395,-3015.51 5440,-2970.51 v1(5525,-2970.51) v1@5525,-2964.64 ; U14.7@6000.51,-935.51 5905,-935.51 5875,-965.51 5875,-1385.51 5970,-1480.51 v1(6230,-1480.51)
  Bottom Layer w10: v1@5525,-2965.51 v1(5525,-2970.51) 5665,-3110.51 6530,-3110.51 6575,-3065.51 6630,-3065.51 6690,-3125.51 6970,-3125.51 7075,-3020.51 7075,-1685.51 7005,-1615.51 6275,-1615.51 6230,-1570.51 v1(6230,-1480.51)
MCU_IN1: D18.1 OP7.3 R43.1 U1.37 | length 3597
  Top Layer w10: R43.1@2450,-4170.51 2450,-4230.51 2550,-4330.51 2665,-4330.51 2740,-4405.51 4055,-4405.51 4211.1,-4249.41 U1.37@4211.1,-4138.03
  Top Layer w12: D18.1@1080,-4299.08 1080,-4345.51 1128.81,-4394.32 1671.19,-4394.32 1835,-4230.51 2045,-4230.51 2103.57,-4171.94 OP7.3@2265,-4171.94 R43.1@2448.57,-4171.94
MCU_IN2: D20.1 OP6.3 R42.1 U1.38 | length 3541.3
  Top Layer w10: R42.1@2450,-4399.08 2450,-4435.51 2480,-4465.51 2695,-4465.51 2730,-4430.51 4060.85,-4430.51 4230.79,-4260.57 U1.38@4230.79,-4138.03
  Top Layer w12: D20.1@1080,-4498.37 1080,-4535.51 1130,-4585.51 1710,-4585.51 1835,-4460.51 1995,-4460.51 2057.86,-4397.66 OP6.3@2265,-4397.66 R42.1@2448.57,-4397.66
MCU_IN3: D21.1 OP5.3 R41.1 U1.39 | length 3624.9
  Top Layer w10: R41.1@2450,-4621.94 2450,-4550.51 2490,-4510.51 2715,-4510.51 2770,-4455.51 4075,-4455.51 4250.47,-4280.04 U1.39@4250.47,-4138.03
  Top Layer w12: D21.1@1080,-4697.65 1080,-4750.51 1110,-4780.51 1680,-4780.51 1770,-4690.51 2035,-4690.51 2102.14,-4623.37 OP5.3@2265,-4623.37 R41.1@2448.57,-4623.37
MCU_IN4: D22.1 OP4.3 R40.1 U1.40 | length 3764.6
  Top Layer w10: R40.1@2450,-4850.51 2450,-4760.51 2490,-4720.51 2705,-4720.51 2945,-4480.51 4080,-4480.51 4270.16,-4290.35 U1.40@4270.16,-4138.03
  Top Layer w12: D22.1@1080,-4896.94 1080,-4970.51 1098,-4988.51 1727,-4988.51 1805,-4910.51 2065,-4910.51 2126.43,-4849.08 OP4.3@2265,-4849.08 R40.1@2448.57,-4849.08
MCU_OUT_Q1: D17.1 R57.2 U1.35 | length 4012.2
  Top Layer w10: R57.2@2450,-3730.51 2450,-3805.51 2475,-3830.51 2725,-3830.51 2775,-3880.51 2775,-4275.51 2855,-4355.51 4040,-4355.51 4171.73,-4223.78 U1.35@4171.73,-4138.03
  Top Layer w12: D17.1@1080,-3900.51 1080,-3970.51 1108.81,-3999.32 1716.19,-3999.32 1775,-3940.51 1775,-3850.51 1830,-3795.51 2010,-3795.51 2020,-3785.51 2335,-3785.51 2390,-3730.51 R57.2@2450,-3730.51
MCU_OUT_Q2: D19.1 R56.2 U1.36 | length 3768.7
  Top Layer w10: 2685,-4085.51 2730,-4130.51 2730,-4310.51 2800,-4380.51 4045,-4380.51 4191.42,-4234.09 U1.36@4191.42,-4138.03
  Top Layer w12: D19.1@1080,-4099.8 1080,-4155.51 1117,-4192.51 1676,-4192.51 1848,-4020.51 2335,-4020.51 2402.14,-3953.37 R56.2@2450,-3953.37 2450,-4035.51 2500,-4085.51 2685,-4085.51
MISO: S1.7 U1.22 U10.30 | length 7865.1
  Top Layer w10: U1.22@4062.48,-3871.3 4165.79,-3871.3 4210,-3915.51 v4(4220,-3915.51) ; v1@6065,-2180.51 6138.11,-2107.4 U10.30@6246.1,-2107.4 ; S1.7@8480,-4845.51 8590,-4845.51 v1(8620,-4815.51)
  Bottom Layer w10: v4(4220,-3915.51) 4250,-3915.51 4261.81,-3903.7 4261.81,-3877.7 4327,-3812.51 4327,-3732.67 5875.53,-2184.13 6056.38,-2184.13 v1(6060,-2180.51) ; 4785,-3275.51 4786.81,-3273.7 6961.47,-3273.7 8065,-4377.23 8065,-4770.51 8110,-4815.51 v1(8620,-4815.51)
MOSI: S1.2 U1.23 U10.29 | length 9580.8
  Top Layer w10: U1.23@4062.48,-3890.98 4115.47,-3890.98 4185,-3960.51 4255,-3960.51 4275,-3940.51 4275,-3905.51 v4(4220,-3850.51) v4@4220,-3845.51 ; v1(6060,-2245.51) 6025,-2245.51 6000,-2220.51 6000,-2130.51 6020,-2110.51 v1(6060,-2110.51) 6100,-2110.51 6122.8,-2087.72 U10.29@6246.1,-2087.72 ; S1.2@8480,-4675.51 v1(8615,-4675.51)
  Bottom Layer w10: v4(4220,-3850.51) 4256,-3850.51 4303.19,-3803.32 4303.19,-3725.63 5868.31,-2160.51 6010,-2160.51 v1(6060,-2110.51) ; v1(6060,-2245.51) 6030,-2215.51 5875,-2215.51 4920,-3170.51 4920,-3235.51 4936.38,-3251.89 6976.38,-3251.89 8095,-4370.51 8095,-4615.51 8155,-4675.51 v1(8615,-4675.51)
MT-5V: C25.2 C26.1 L10.1 R24.1 U7.20 | length 2533.2
  Top Layer w10: U7.20@4450,-2869.65 4504.13,-2869.65 v1(4505,-2870.51) 4505,-2820.51 4535,-2790.51 4670,-2790.51 4685,-2805.51 4685,-2884.13 4701.81,-2900.94 4725,-2900.94 4730,-2905.94 R24.1@4730,-2935.51 ; L10.1@4800.71,-2320.51 4800.71,-2386.23 4820,-2405.51 5110,-2405.51 5130,-2385.51 5130,-2275.51 5150,-2255.51 5240,-2255.51 5260,-2275.51 5260,-2405.51 5245,-2420.51 C26.1@5245,-2480.51 C25.2@5245,-2583.21
  Bottom Layer w16: v1(4505,-2870.51) 4505,-2565.51 4590,-2480.51 v1(5250,-2480.51)
MT_D0: U1.11 U7.14 | length 866.8
  Top Layer w10: U7.14@4150,-2869.65 4150,-3125.51 4230.79,-3206.3 U1.11@4230.79,-3702.99
MT_D1: U1.10 U7.15 | length 854.3
  Top Layer w10: U7.15@4200,-2869.65 4200,-3145.51 4250.47,-3195.98 U1.10@4250.47,-3702.99
MT_D2: U1.9 U7.16 | length 841.7
  Top Layer w10: U7.16@4250,-2869.65 4250,-3160.51 4270.16,-3180.67 U1.9@4270.16,-3702.99
MT_D3: U1.8 U7.17 | length 837.3
  Top Layer w10: U1.8@4290,-3702.83 4290,-3170.51 4300,-3160.51 U7.17@4300,-2869.65
MT_IRQ: R24.2 U1.14 U7.13 | length 1700.3
  Top Layer w10: U1.14@4171.73,-3702.99 4171.73,-3637.24 4150,-3615.51 4150,-3521.51 4175,-3496.51 4175,-3189.67 4100,-3114.67 U7.13@4100,-2869.65 4100,-2780.51 4120,-2760.51 4711.38,-2760.51 4730,-2779.13 R24.2@4730,-2860.51
MT_RD: U1.15 U7.12 | length 909.9
  Top Layer w10: U7.12@4050,-2869.65 4050,-3100.51 4152.05,-3202.56 4152.05,-3485.46 4125,-3512.51 4125,-3620.51 4152.05,-3647.56 ; U1.15@4152.05,-3702.99 4152.05,-3647.56 ; 4152.05,-3659.39 4152.05,-3647.56
MT_RS: U1.24 U7.11 | length 1225.5
  Top Layer w10: U7.11@4000,-2869.65 3895,-2974.65 3895,-3865.51 3940.16,-3910.67 U1.24@4062.48,-3910.67
MT_RW: U1.25 U7.9 | length 1649.7
  Top Layer w10: U7.9@4050,-2511.38 4050,-2645.51 3875,-2820.51 3875,-3880.51 3924.84,-3930.35 U1.25@4062.48,-3930.35
MT_VREF: U7.1 U7.4 | length 318.3
  Top Layer w10: U7.4@4300,-2511.38 4300,-2435.51 4320,-2415.51 4430,-2415.51 4450,-2435.51 U7.1@4450,-2511.38
NetC1_1: C1.1 D1.2 | length 491.3
  Top Layer w10: D1.2@3385,-2760.51 3445,-2760.51 3525,-2840.51 3525,-3045.51 C1.1@3605,-3125.51
NetC2_1: C2.1 D1.3 OP1.2 R2.2 | length 1401.2
  Top Layer w10: D1.3@3285,-2540.51 3320,-2540.51 3335,-2555.51 3335,-2820.51 3315,-2840.51 3240,-2840.51 3215,-2865.51 3215,-2975.51 3230,-2990.51 R2.2@3275,-2990.51 3275,-3110.51 3290,-3125.51 C2.1@3350,-3125.51 3350,-3185.51 3220,-3315.51 3220,-3555.51 3232.14,-3567.66 OP1.2@3295,-3567.66
NetC2_2: C2.2 D1.1 R1.1 | length 1320.9
  Top Layer w10: C2.2@3350,-3345.51 3425,-3345.51 3477.5,-3293.01 R1.1@3477.5,-2990.51 ; v1(3385,-2680.51) D1.1@3385,-2540.51
  Bottom Layer w10: C2.2@3350,-3345.51 3350,-3270.51 3445,-3175.51 3445,-2890.51 3385,-2830.51 v1(3385,-2680.51)
NetC7_1: C7.1 C11.1 L2.2 U4.3 | length 770.2
  Top Layer w25: C11.1@3805,-345.51 3805,-695.51 3845,-735.51 L2.2@3925,-735.51 ; U4.3@3939.45,-893.46 3939.45,-829.96 3925,-815.51 L2.2@3925,-735.51 ; C7.1@4043.65,-733.11 3927.4,-733.11 L2.2@3925,-735.51
NetC8_1: C8.1 C10.1 L1.2 U5.3 | length 849.2
  Top Layer w25: U5.3@4904.45,-893.46 4905,-892.91 4905,-820.51 4880,-795.51 L1.2@4880,-735.51 ; C10.1@4930,-345.51 4930,-435.51 4900,-465.51 4840,-465.51 4790,-515.51 4790,-710.51 4815,-735.51 L1.2@4880,-735.51 ; C8.1@5001.15,-733.11 4998.75,-735.51 L1.2@4880,-735.51
NetC9_1: C9.1 C12.1 L3.2 U6.3 | length 759
  Top Layer w25: L3.2@4385,-737.91 4385,-795.51 4421.95,-832.46 U6.3@4421.95,-893.46 ; v4(4625,-660.51) 4625,-520.51 4650,-495.51 C12.1@4650,-345.51
  Bottom Layer w16: v1(4385,-715.51) 4430,-670.51 4615,-670.51 v4(4625,-660.51)
NetC26_2: C26.2 R23.1 U7.19 | length 1794
  Top Layer w10: U7.19@4400,-2869.65 4400,-2965.51 4420,-2985.51 4520,-2985.51 4565,-2940.51 4565,-2890.51 4595,-2860.51 R23.1@4635,-2860.51 4635,-2890.51 4639.57,-2895.08 4667.55,-2895.08 4680,-2907.52 4680,-2995.51 4705,-3020.51 5225,-3020.51 5275,-2970.51 5275,-2825.51 5375,-2725.51 5375,-2495.51 5360,-2480.51 C26.2@5320,-2480.51
NetC27_1: C27.1 U1.5 X2.2 | length 2076.2
  Top Layer w10: U1.5@4348.9,-3702.99 4348.9,-3391.61 4390,-3350.51 4715,-3350.51 4780,-3285.51 X2.2@4910.2,-3285.51 4910.2,-3420.71 4950,-3460.51 5205,-3460.51 5240,-3425.51 5240,-3150.51 5195,-3105.51 C27.1@4870,-3105.51
NetC28_1: C28.1 K4.7 T2.3 | length 5546.1
  Top Layer w16: K4.7@1340,-2075.51 1396,-2075.51 1435,-2114.51 1435,-2205.51 1355,-2285.51 v2(1355,-2555.51) 1355,-3180.51 T2.3@1480,-3305.51
  Bottom Layer w16: v2(1355,-2555.51) 3105,-2555.51 3610,-2050.51 5135,-2050.51 5195,-2110.51 v1(5195,-2195.51)
NetC28_2: C28.2 R27.2 | length 677.5
  Top Layer w10: R27.2@5110,-2935.51 5155,-2935.51 5175,-2915.51 5175,-2420.51 5195,-2400.51 5195,-2322.66 C28.2@5192.86,-2320.51
NetC29_1: C29.1 U1.6 X2.1 | length 731.3
  Top Layer w10: U1.6@4329.21,-3702.99 4329.21,-3381.3 4425,-3285.51 X2.1@4485,-3285.51 4485,-3120.51 4495,-3110.51 C29.1@4530,-3110.51
NetC31_1: C31.1 R36.2 U10.18 X4.2 | length 1702.8
  Top Layer w10: X4.2@6199.8,-1640.51 6204.8,-1645.51 6365,-1645.51 ; U10.18@6415.39,-1957.8 6415.39,-1695.91 6365,-1645.51 ; C31.1@6915,-1935.51 6915,-1900.51 6930,-1885.51 7070,-1885.51 7095,-1860.51 7095,-1760.51 7065,-1730.51 R36.2@6990,-1730.51 6990,-1670.51 6895,-1575.51 6435,-1575.51 6365,-1645.51
NetC32_1: C32.1 R36.1 U10.17 X4.1 | length 941.6
  Top Layer w10: U10.17@6435.08,-1957.8 6435.08,-1695.43 6490,-1640.51 X4.1@6625,-1640.51 6875,-1640.51 6915,-1680.51 R36.1@6915,-1730.51 C32.1@6915,-1835.51 C32.1@6915,-1840.51
NetC33_1: C33.1 U8.2 | length 257.4
  Top Layer w10: U8.2@4465.24,-5125.93 4514.58,-5125.93 4530,-5110.51 4530,-4945.58 C33.1@4514.93,-4930.51
NetC34_1: C34.1 U8.3 | length 332.3
  Top Layer w10: C34.1@4400,-4930.51 4400,-4975.51 4370,-5005.51 4370,-5140.51 4405.42,-5175.93 U8.3@4465.24,-5175.93
NetC34_2: C34.2 U8.1 | length 257.9
  Top Layer w10: C34.2@4400,-4855.51 4435,-4855.51 4465.24,-4885.76 U8.1@4465.24,-5065.93
NetC36_2: C36.2 R37.2 | length 1440.6
  Top Layer w10: C36.2@6622.8,-3385.51 6622.8,-3274.71 6662,-3235.51 7070,-3235.51 7120,-3185.51 7120,-2923.51 7007,-2810.51 6825,-2810.51 6780,-2765.51 R37.2@6780,-2637.28
NetC39_1: C39.1 R37.1 U10.48 | length 807.4
  Top Layer w10: U10.48@6513.82,-2276.69 6513.82,-2359.33 6580,-2425.51 6674,-2425.51 6780,-2531.51 6780,-2562.28 6743.23,-2562.28 6735,-2570.51 6735,-2680.51 6715,-2700.51 6615,-2700.51 6595.33,-2680.84 C39.1@6595.33,-2638.9
NetC43_2: C43.2 U10.44 | length 334.5
  Top Layer w10: C43.2@6320.9,-2563.9 6320.9,-2519.61 6435.08,-2405.43 U10.44@6435.08,-2276.69
NetC44_1: C44.1 R50.1 | length 372.7
  Top Layer w10: C44.1@5955,-2638.9 5955,-2680.51 5970,-2695.51 6215,-2695.51 6231.14,-2679.37 R50.1@6231.14,-2637.28
NetC45_1: C45.1 R51.1 | length 343.7
  Top Layer w10: C45.1@6504.06,-2563.9 6504.06,-2521.46 6520,-2505.51 6620,-2505.51 6640,-2525.51 6640,-2620.51 6656.77,-2637.28 R51.1@6688.52,-2637.28
NetC46_1: C46.1 R52.1 | length 91.6
  Top Layer w10: C46.1@6048.09,-2637.28 R52.1@6139.67,-2637.28
NetC47_2: C47.2 R53.1 | length 363.2
  Top Layer w10: C47.2@5775,-3385.51 5775,-3265.51 5867.21,-3173.3 R53.1@5867.21,-3060.51
NetC49_1: C49.1 R58.1 | length 466.1
  Top Layer w10: R58.1@6185,-3060.51 6220,-3060.51 6240,-3040.51 6240,-2935.51 6265,-2910.51 6330,-2910.51 6350,-2930.51 6350,-3045.51 6365,-3060.51 C49.1@6397.94,-3060.51
NetC49_2: C49.2 U11.1 | length 660.4
  Top Layer w10: C49.2@6397.94,-2985.51 6440,-2985.51 6450,-2995.51 6450,-3110.51 6460,-3120.51 6540,-3120.51 6555,-3105.51 6555,-2960.51 6575,-2940.51 U11.1@6775.51,-2940.51